# Altium PCB 心率传感器转接板.PcbDoc
Units mil, origin at the board's own origin, x right, y up, seen from the top; angles counter-clockwise.
Board outline 271.8 x 264.91 mil, 2 copper layers (Top Layer, Bottom Layer); 3 components, 0 nets, 30 pads, 11 vias.
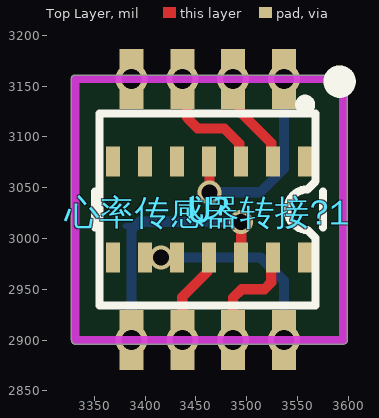
[diagram p0: Top Layer view]
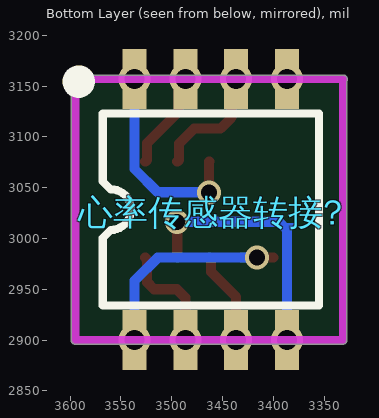
[diagram p1: Bottom Layer view, seen from below]

## Layer stack, top to bottom
Top Solder: solder mask 0.4, Solder Resist, Dk 3.5
Top Layer: signal copper 1.4
Dielectric 1: dielectric 12.6, FR-4, Dk 4.8
Bottom Layer: signal copper 1.4
Bottom Solder: solder mask 0.4, Solder Resist, Dk 3.5

## Board outline
3327.57,2900 3327.57,3155.22 cw(c3331.22,3156.88) 3331.22,3160.9 3331.58,3160.9 3595,3160.9 cw(c3595,3156.88) 3599.01,3156.88 3599.01,2900 cw(c3595,2900) 3595,2895.99 3376.58,2895.99 cw(c3376.58,2900) 3376.54,2895.99 3331.58,2895.99 cw(c3331.58,2900)

## Design rules (kind name [scope] priority, off if disabled: settings)
Clearance [All] p1: gap=10 ignorepadtopadclearanceinfootprint=FALSE except(0: Arc-Hole Track-Hole SMDPad-Hole THPad-Hole Via-Hole Fill-Hole Poly-Hole Region-Hole Text-Hole)
PolygonConnect [All] p1: connectstyle=Relief reliefconductorwidth=10 reliefentries=4 polygonreliefangle="90 Angle" airgapwidth=10
RoutingVias [All] p1: holewidth=28 width=50 viastyle="Through Hole" minholewidth=28 minwidth=50 maxholewidth=28 maxwidth=50
SolderMaskExpansion [All] p1: expansion=4 istentingtop=FALSE
Width [All] p1: maxlimit=10 minlimit=10 preferedwidth=10
30 further rules are at their usual default settings.

## Components (designator, comment, footprint, x,y, rotation, side; value= is the part's Value field where it differs from the comment)
U? "MAX30102EFD+" FP-F143A5-1-MFG 3463.11,3028.41 r270 top
心率传感器转接? "转接" SOP8改#1 3461.58,3028.44 r270 bottom
心率传感器转接?1 "转接" SOP8改#2 3461.58,3028.44 r270 top (schematic designator 心率传感器转接?)

## Footprints (in the part's own frame and the unit in brackets; to place one, negate y for a bottom-side part, rotate by r counter-clockwise, add the part's x,y. Pads: shape width x height; smd on the part's side, far side on the other; paste and mask are expansions set on the pad)
FP-F143A5-1-MFG [mm]
  rect 0.75x0.35 smd paste+0 mask+0: 1(-1.2,2.4) 2(-1.2,1.6) 3(-1.2,0.8) 4(-1.2,0) 5(-1.2,-0.8) 6(-1.2,-1.6) 7(-1.2,-2.4) 8(1.2,-2.4) 9(1.2,-1.6) 10(1.2,-0.8) 11(1.2,0) 12(1.2,0.8) 13(1.2,1.6) 14(1.2,2.4)
  silkscreen extent -2.75,-2.85 0.45,2.85, body extent -2.2,-3.35 2.2,3.35, height 0.25
SOP8改#1 [mm]
  rect 1.5x0.6 smd: 1(-3.262,-1.905) 2(-3.262,-0.635) 3(-3.262,0.635) 4(-3.262,1.905) 5(3.262,1.905) 6(3.262,0.635) 7(3.262,-0.635) 8(3.262,-1.905)
  silkscreen extent -3.35,-3.45 2.4,2.7, body extent -3,-2.8 3,2.8, height 3.15
SOP8改#2 [mm]
  rect 1.5x0.6 smd: 1(-3.262,1.905) 2(-3.262,0.635) 3(-3.262,-0.635) 4(-3.262,-1.905) 5(3.262,-1.905) 6(3.262,-0.635) 7(3.262,0.635) 8(3.262,1.905)
  silkscreen extent -3.35,-2.7 2.4,3.45, body extent -3,-2.8 3,2.8, height 3.15

## Part data
U?: library part CMP-05738-000003-1, "IC SENSOR OXIMETER/HEARTRATE", Manufacturer="Maxim Integrated", Max Junction Temp=+90°C, Max Supply Voltage=2V, Min Supply Voltage=1.7V, Operating Supply Current=600uA, Package=F143A5-1, Temperature="-40°C to +85°C", Temperature Range High=+85°C, Temperature Range Low=-40°C, Automotive=No, Category=IC, ComponentLink2Description=Datasheet, ComponentLink2URL=https://datasheets.maximintegrated.com/en/ds/MAX30102.pdf, Device Class L1=Sensors, Device Class L2=unset, Device Class L3=unset, Digikey Description="IC SENSOR OXIMETER/HEARTRATE", Footprint Url=https://pdfserv.maximintegrated.com/land_patterns/90-0602.PDF, Height=1.65mm, Lead Free=Yes, Manufacturer Part Number=MAX30102EFD+, Mouser Description="Pulse Oximeter/Heart Rate Sensor, Oesip", Octopart=https://octopart.com/max30102efd%2B-maxim+integrated-59568799, RoHS=TRUE, Sensor Output=I2C
心率传感器转接? 心率传感器转接?1: library part 25CXX, 联系卖家，免费查找封装=唯一出售店铺网址https://shop463601444.taobao.com

## Via types
v1: diameter 31.5, hole 19.68, Top Layer to Bottom Layer, tented both sides, 8 vias
v2: diameter 23.62, hole 15.75, Top Layer to Bottom Layer, tented both sides, 3 vias

## Nets (pads, with @x,y where several pads share a name; then routed paths per layer and width w, separated by ;. In a path a pad name is that pad's centre, name@x,y a point inside that pad or via, vN(x,y) a via of type N, cw(c..) or ccw(c..) an arc to the next point about the centre after c; other vN are vias at no path point)
pads on no net: U?.1 U?.2 U?.3 U?.4 U?.5 U?.6 U?.7 U?.8 U?.9 U?.10 U?.11 U?.12 U?.13 U?.14 心率传感器转接?1.1 心率传感器转接?1.2 心率传感器转接?1.3 心率传感器转接?1.4 心率传感器转接?1.5 心率传感器转接?1.6 心率传感器转接?1.7 心率传感器转接?1.8 心率传感器转接?.1 心率传感器转接?.2 心率传感器转接?.3 心率传感器转接?.4 心率传感器转接?.5 心率传感器转接?.6 心率传感器转接?.7 心率传感器转接?.8
copper on no net: | length 1107.4
  Top Layer w10: 3400.12,2981.17 v2(3415.87,2981.17) 3431.61,2981.17 ; v1(3436.58,2900) 3436.58,2942.4 3461.22,2967.04 3461.22,2979.28 3463.11,2981.17 ; v1(3436.58,3156.88) 3441.24,3152.23 3441.24,3118.99 3451.86,3108.37 3477.84,3108.37 3492.72,3093.5 3492.72,3077.55 3494.61,3075.66 ; 3463.11,3075.66 3463.28,3075.49 3463.28,3045.67 v2(3463.44,3045.51) ; v1(3486.58,2900) 3486.58,2941.65 3495.08,2950.15 3517.47,2950.15 3524.21,2956.89 3524.21,2979.28 3526.1,2981.17 ; v1(3486.58,3156.88) 3493.39,3150.07 3493.39,3124.91 3524.21,3094.1 3524.21,3077.55 3526.1,3075.66 ; 3494.61,2981.17 v2(3494.61,3016.47)
  Bottom Layer w6: 3380.61,3012.45 3390.59,3012.45
  Bottom Layer w10: v1(3386.58,2900) 3386.58,3008.44 3394.61,3016.47 v2(3494.61,3016.47) ; v2(3415.87,2981.17) 3513.85,2981.17 3536.58,2958.44 v1(3536.58,2900) ; v2(3463.44,3045.51) 3513.65,3045.51 3536.58,3068.44 v1(3536.58,3156.88)
  other v1: 3386.58,3156.88

## Keep-outs
Keep-Out Layer:
  lines w8: 3331.22,3156.88 3331.58,3156.88 ; 3376.58,2900 3595,2900 3595,3156.88 3331.58,3156.88 ; 3386.58,2900 3331.58,2900 3331.58,3156.88 ; 3331.58,3156.88 3331.58,3156.88